# Altium PCB daughterboardFunkySwitch.PcbDoc
Units mil, origin at the board's own origin, x right, y up, seen from the top; angles counter-clockwise.
Board outline 2165.41 x 2548.15 mil, 2 copper layers (Top Layer, Bottom Layer); 8 components, 37 nets, 124 pads, 0 vias.
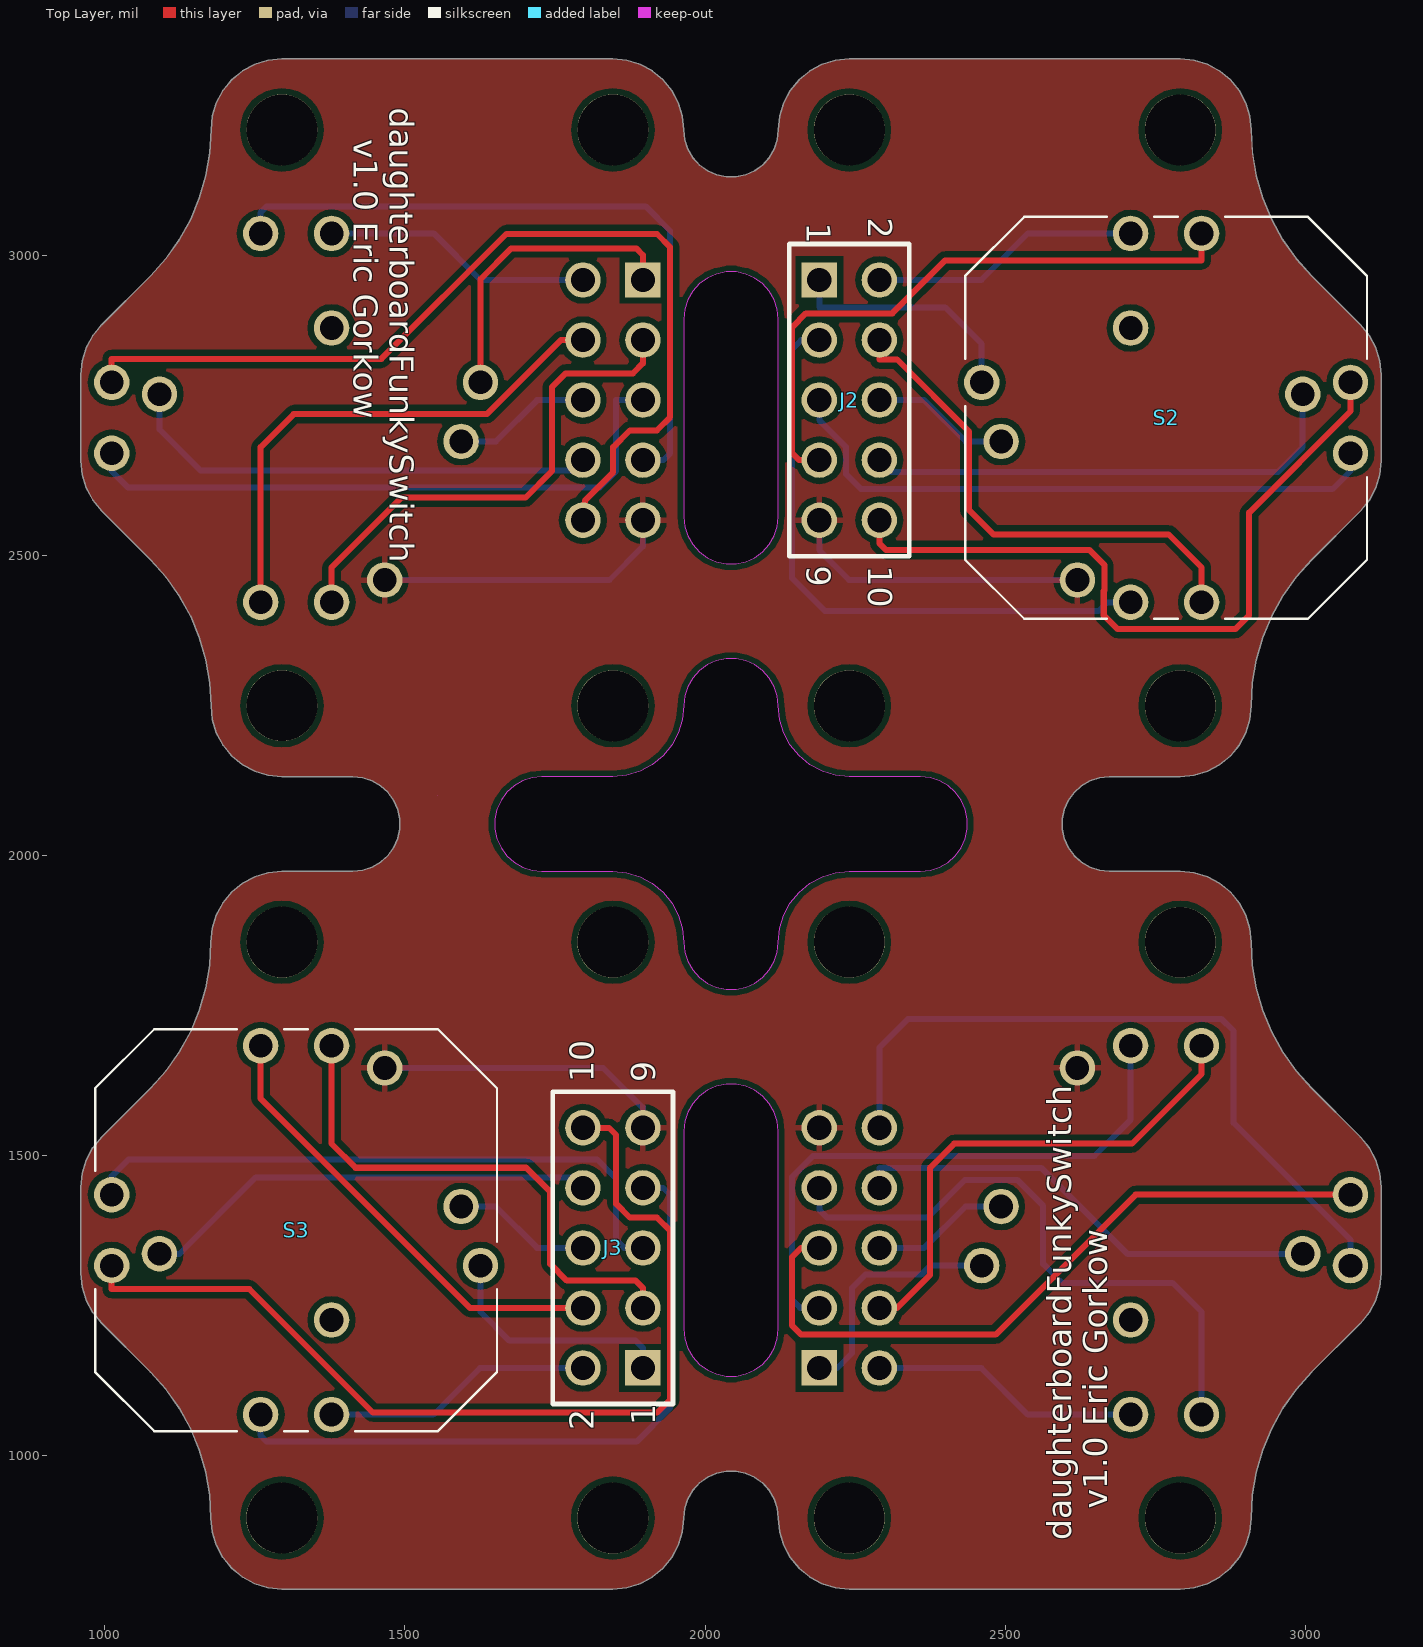
[diagram p0: Top Layer view]
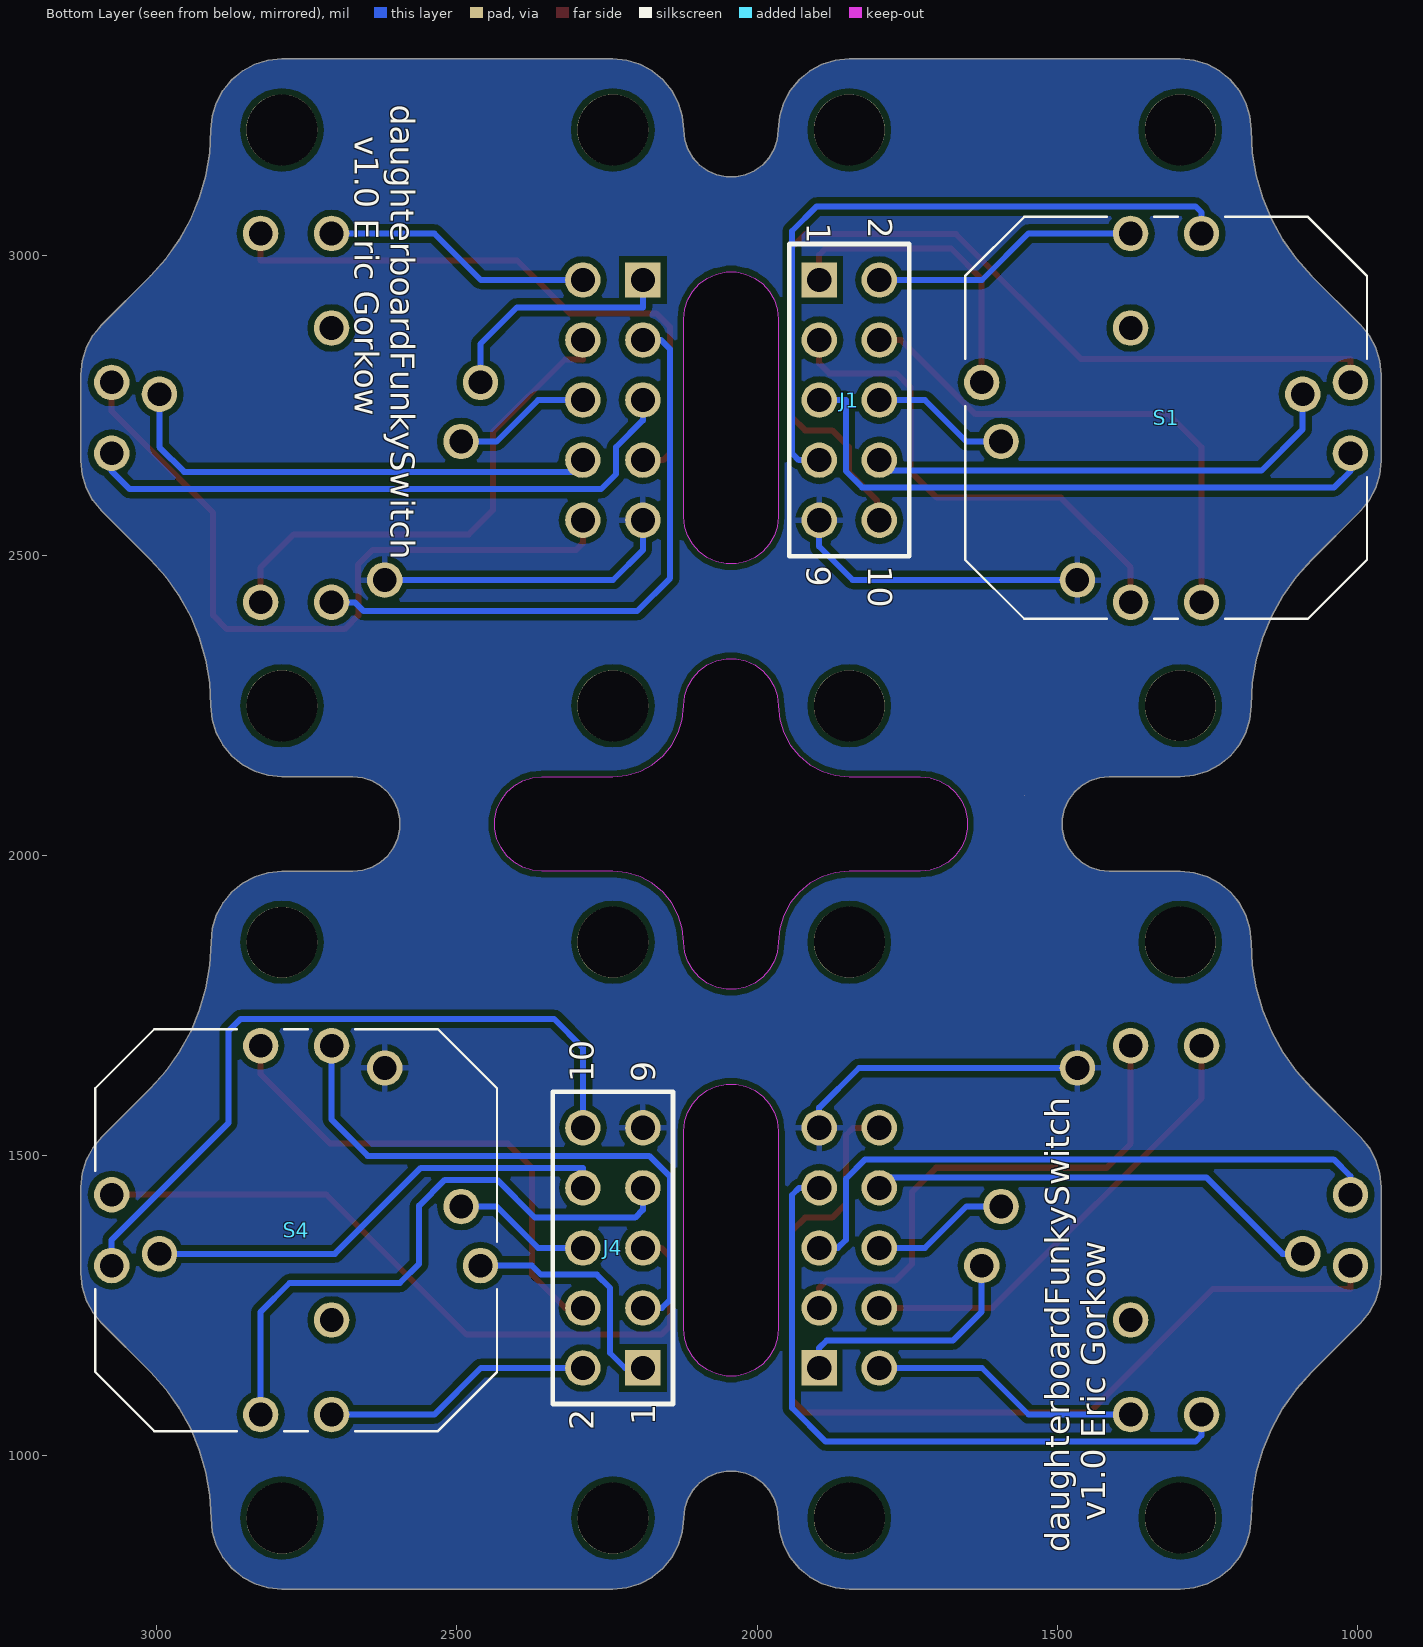
[diagram p1: Bottom Layer view, seen from below]
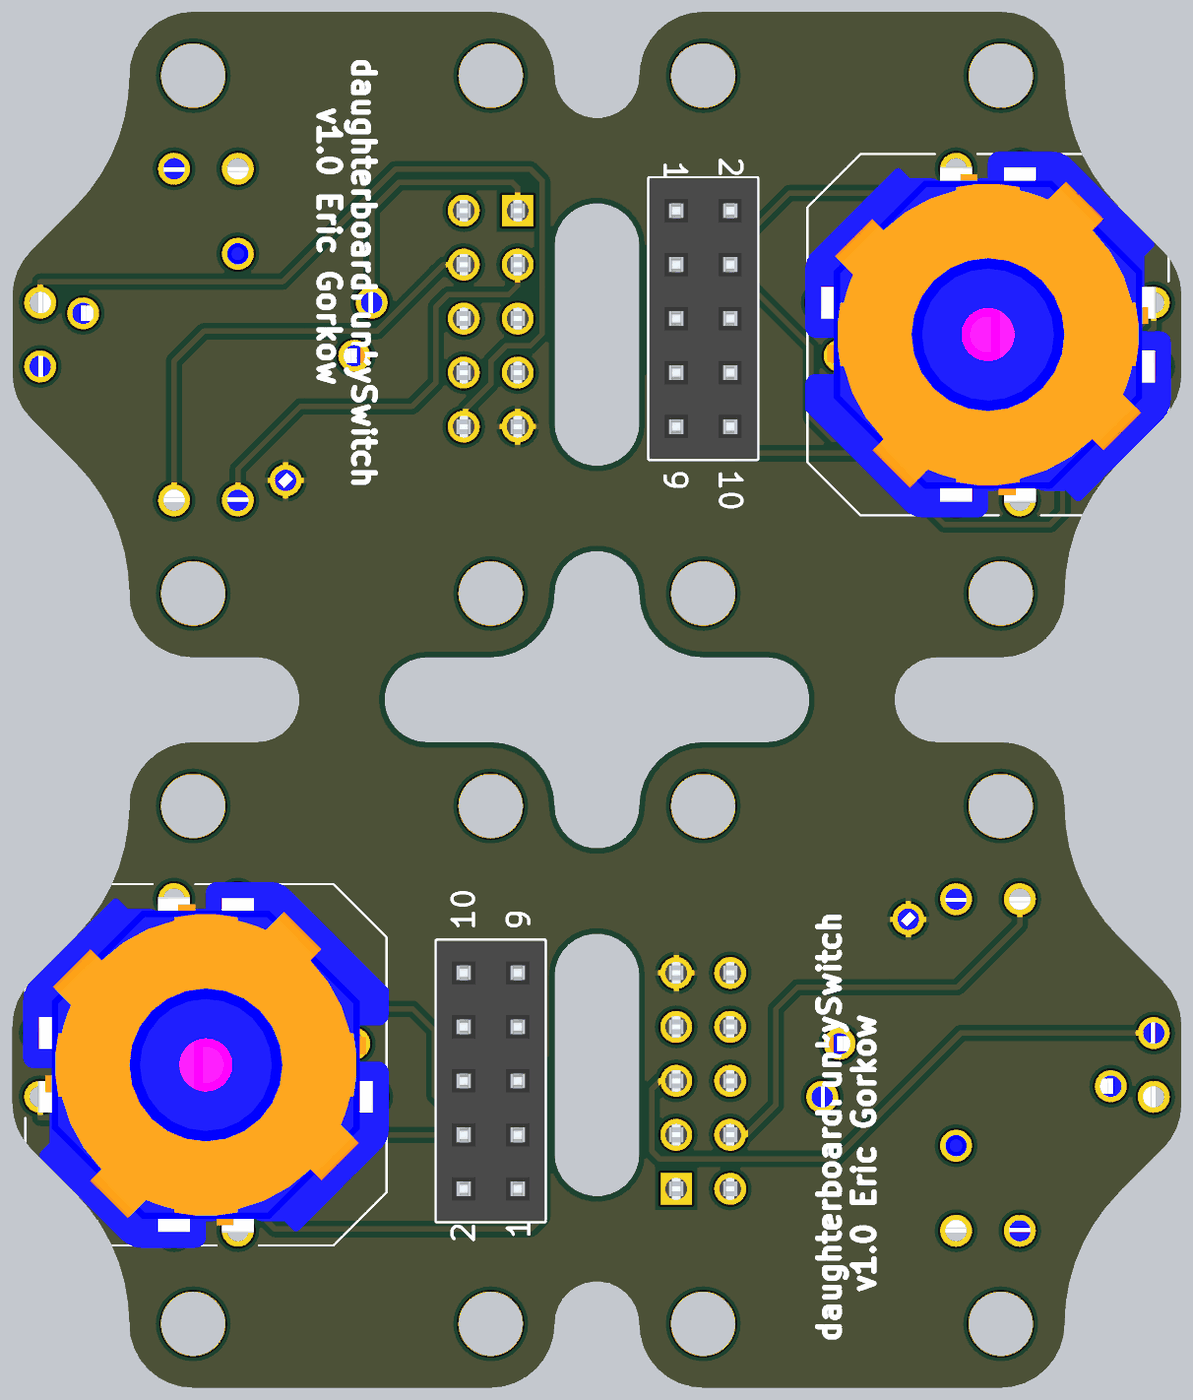
[diagram p2: 3D render of the assembled board from above, using the file's embedded part models]
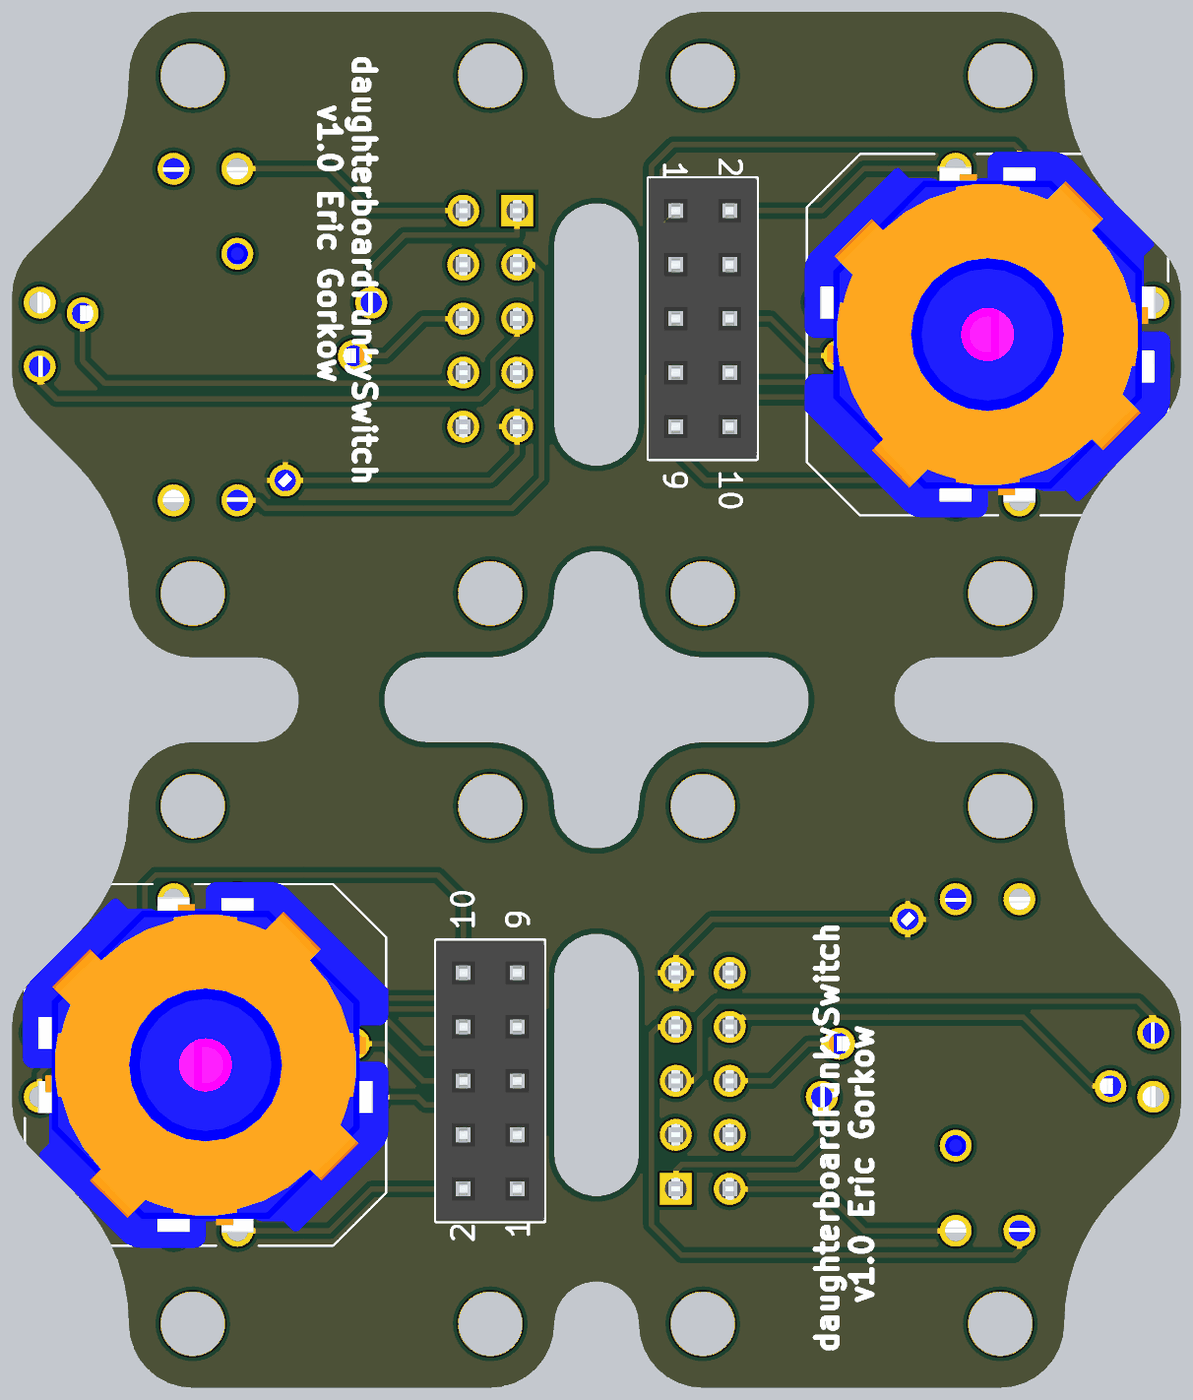
[diagram p3: 3D render of the assembled board from below, using the file's embedded part models]

## Layer stack, top to bottom
Top Solder: solder mask 0.4, Solder Resist, Dk 3.5
Top Layer: signal copper 1.4
Dielectric 1: dielectric 12.6, FR-4, Dk 4.8
Bottom Layer: signal copper 1.4
Bottom Solder: solder mask 0.4, Solder Resist, Dk 3.5

## Board outline
1413.47,2131.24 1295.36,2131.24 1272.31,2133.51 1250.16,2140.23 1229.74,2151.15 1211.84,2165.84 1197.15,2183.74 1186.24,2204.16 1179.52,2226.31 1177.25,2249.36 1175.09,2287.86 1168.63,2325.88 1157.96,2362.94 1143.2,2398.57 1124.54,2432.32 1102.23,2463.78 1076.53,2492.53 995.32,2573.75 980.63,2591.65 969.72,2612.07 963,2634.23 960.73,2657.27 960.73,2800.54 963,2823.59 969.73,2845.74 980.64,2866.16 995.33,2884.06 1076.55,2965.27 1102.25,2994.03 1124.57,3025.48 1143.22,3059.23 1157.98,3094.86 1168.66,3131.92 1175.12,3169.94 1177.28,3208.44 1179.56,3231.48 1186.28,3253.64 1197.19,3274.06 1211.88,3291.96 1229.78,3306.65 1250.2,3317.56 1272.36,3324.28 1295.4,3326.55 1846.58,3326.53 1869.62,3324.26 1891.78,3317.54 1912.2,3306.62 1930.1,3291.93 1944.78,3274.03 1955.7,3253.61 1962.42,3231.46 1964.69,3208.41 1966.41,3192.04 1971.49,3176.39 1979.72,3162.13 1990.74,3149.9 2004.05,3140.22 2019.09,3133.52 2035.19,3130.1 2051.65,3130.1 2067.76,3133.52 2082.79,3140.22 2096.11,3149.89 2107.13,3162.13 2115.36,3176.38 2120.45,3192.04 2122.17,3208.41 2124.44,3231.45 2131.16,3253.61 2142.07,3274.03 2156.76,3291.92 2174.66,3306.61 2195.08,3317.52 2217.24,3324.24 2240.28,3326.51 2791.46,3326.49 2814.5,3324.22 2836.66,3317.5 2857.08,3306.59 2874.98,3291.9 2889.67,3274 2900.58,3253.58 2907.3,3231.42 2909.57,3208.38 2911.73,3169.87 2918.19,3131.85 2928.86,3094.8 2943.62,3059.16 2962.27,3025.41 2984.59,2993.96 3010.28,2965.2 3091.5,2883.98 3106.19,2866.08 3117.1,2845.66 3123.82,2823.51 3126.09,2800.46 3126.08,2657.19 3123.81,2634.15 3117.09,2611.99 3106.18,2591.57 3091.49,2573.67 3010.27,2492.46 2984.57,2463.71 2962.25,2432.25 2943.6,2398.5 2928.84,2362.87 2918.16,2325.82 2911.7,2287.8 2909.53,2249.29 2907.26,2226.25 2900.54,2204.09 2889.63,2183.67 2874.94,2165.78 2857.04,2151.09 2836.62,2140.17 2814.46,2133.45 2791.42,2131.19 2673.31,2131.19 2656.94,2129.47 2641.28,2124.38 2627.03,2116.15 2614.79,2105.14 2605.12,2091.82 2598.42,2076.78 2595,2060.68 2595,2044.22 2598.42,2028.12 2605.11,2013.08 2614.79,1999.76 2627.02,1988.75 2641.28,1980.52 2656.93,1975.43 2673.3,1973.71 2791.41,1973.71 2814.45,1971.43 2836.61,1964.71 2857.03,1953.8 2874.93,1939.11 2889.62,1921.21 2900.53,1900.79 2907.25,1878.63 2909.52,1855.59 2911.68,1817.09 2918.14,1779.07 2928.81,1742.01 2943.57,1706.38 2962.22,1672.62 2984.54,1641.17 3010.24,1612.41 3091.45,1531.19 3106.14,1513.3 3117.05,1492.88 3123.77,1470.72 3126.04,1447.68 3126.03,1304.4 3123.76,1281.36 3117.04,1259.2 3106.13,1238.78 3091.44,1220.89 3010.22,1139.67 2984.52,1110.92 2962.2,1079.47 2943.55,1045.71 2928.79,1010.09 2918.11,973.03 2911.65,935.01 2909.48,896.5 2907.21,873.46 2900.49,851.31 2889.58,830.89 2874.89,812.99 2856.99,798.3 2836.57,787.39 2814.41,780.67 2791.37,778.4 2240.19,778.42 2217.15,780.69 2194.99,787.41 2174.57,798.33 2156.67,813.01 2141.98,830.91 2131.07,851.33 2124.35,873.49 2122.08,896.53 2120.36,912.9 2115.28,928.56 2107.05,942.82 2096.03,955.05 2082.71,964.73 2067.68,971.42 2051.57,974.84 2035.11,974.84 2019.01,971.42 2003.97,964.73 1990.66,955.05 1979.64,942.82 1971.41,928.56 1966.32,912.91 1964.6,896.54 1962.33,873.5 1955.61,851.34 1944.69,830.92 1930,813.02 1912.11,798.34 1891.69,787.42 1869.53,780.7 1846.49,778.43 1295.31,778.45 1272.26,780.72 1250.11,787.45 1229.69,798.36 1211.79,813.05 1197.1,830.95 1186.19,851.37 1179.47,873.53 1177.2,896.57 1175.04,935.07 1168.58,973.09 1157.91,1010.15 1143.15,1045.78 1124.49,1079.53 1102.18,1110.99 1076.48,1139.74 995.27,1220.96 980.58,1238.86 969.67,1259.28 962.95,1281.44 960.68,1304.48 960.68,1447.76 962.95,1470.8 969.68,1492.96 980.59,1513.37 995.28,1531.27 1076.5,1612.48 1102.2,1641.24 1124.52,1672.69 1143.17,1706.44 1157.93,1742.07 1168.61,1779.13 1175.07,1817.15 1177.23,1855.65 1179.51,1878.7 1186.23,1900.85 1197.14,1921.27 1211.83,1939.17 1229.73,1953.86 1250.15,1964.77 1272.31,1971.49 1295.35,1973.76 1413.46,1973.76 1429.83,1975.48 1445.49,1980.56 1459.74,1988.79 1471.98,1999.81 1481.65,2013.12 1488.35,2028.16 1491.77,2044.26 1491.77,2060.72 1488.35,2076.83 1481.66,2091.86 1471.98,2105.18 1459.75,2116.2 1445.49,2124.43 1429.84,2129.51
cut-out: 1728.43,2131.22 1712.06,2129.5 1696.4,2124.42 1682.14,2116.19 1669.91,2105.17 1660.23,2091.86 1653.54,2076.82 1650.11,2060.72 1650.11,2044.26 1653.54,2028.16 1660.23,2013.12 1669.91,1999.8 1682.14,1988.78 1696.39,1980.55 1712.05,1975.47 1728.42,1973.74 1846.53,1973.74 1869.57,1971.47 1891.73,1964.75 1912.15,1953.83 1930.05,1939.14 1944.73,1921.24 1955.65,1900.82 1962.37,1878.67 1964.64,1855.63 1966.36,1839.25 1971.44,1823.6 1979.67,1809.34 1990.69,1797.11 2004,1787.43 2019.04,1780.74 2035.14,1777.31 2051.6,1777.31 2067.71,1780.74 2082.74,1787.43 2096.06,1797.11 2107.08,1809.34 2115.31,1823.59 2120.4,1839.25 2122.12,1855.62 2124.39,1878.66 2131.11,1900.82 2142.02,1921.24 2156.71,1939.13 2174.61,1953.82 2195.03,1964.74 2217.19,1971.46 2240.23,1973.73 2358.34,1973.72 2374.71,1975.44 2390.37,1980.53 2404.62,1988.76 2416.86,1999.77 2426.53,2013.09 2433.23,2028.13 2436.65,2044.23 2436.65,2060.69 2433.23,2076.79 2426.54,2091.83 2416.86,2105.15 2404.63,2116.16 2390.37,2124.39 2374.72,2129.48 2358.35,2131.2 2240.24,2131.21 2217.2,2133.48 2195.04,2140.2 2174.62,2151.11 2156.72,2165.8 2142.03,2183.7 2131.12,2204.12 2124.4,2226.28 2122.13,2249.32 2120.41,2265.69 2115.32,2281.35 2107.09,2295.6 2096.08,2307.84 2082.76,2317.51 2067.73,2324.21 2051.62,2327.63 2035.16,2327.63 2019.06,2324.21 2004.02,2317.52 1990.71,2307.84 1979.69,2295.61 1971.46,2281.35 1966.37,2265.7 1964.65,2249.33 1962.38,2226.28 1955.66,2204.13 1944.74,2183.71 1930.05,2165.81 1912.16,2151.12 1891.74,2140.21 1869.58,2133.49 1846.54,2131.22
cut-out: 1964.67,2893.45 1964.66,2564.29 1966.38,2547.92 1971.47,2532.26 1979.7,2518 1990.71,2505.77 2004.03,2496.09 2019.07,2489.4 2035.17,2485.98 2051.63,2485.97 2067.73,2489.4 2082.77,2496.09 2096.09,2505.77 2107.1,2518 2115.33,2532.25 2120.42,2547.91 2122.14,2564.28 2122.16,2893.45 2120.43,2909.82 2115.35,2925.47 2107.12,2939.73 2096.1,2951.96 2082.79,2961.64 2067.75,2968.34 2051.65,2971.76 2035.19,2971.76 2019.09,2968.34 2004.05,2961.64 1990.73,2951.97 1979.71,2939.73 1971.48,2925.48 1966.4,2909.82
cut-out: 1964.62,1540.66 1964.61,1211.5 1966.33,1195.13 1971.42,1179.47 1979.65,1165.22 1990.66,1152.98 2003.98,1143.31 2019.02,1136.61 2035.12,1133.19 2051.58,1133.19 2067.68,1136.61 2082.72,1143.3 2096.04,1152.98 2107.05,1165.21 2115.28,1179.47 2120.37,1195.12 2122.09,1211.49 2122.11,1540.66 2120.39,1557.03 2115.3,1572.69 2107.07,1586.94 2096.05,1599.18 2082.74,1608.85 2067.7,1615.55 2051.6,1618.97 2035.14,1618.97 2019.04,1615.55 2004,1608.85 1990.68,1599.18 1979.66,1586.95 1971.43,1572.69 1966.35,1557.04
cut-out: 1555,2100
cut-out: 690,2205

## Design rules (kind name [scope] priority, off if disabled: settings)
Clearance [All] p1: gap=10 ignorepadtopadclearanceinfootprint=FALSE except(0: Arc-Hole Track-Hole SMDPad-Hole THPad-Hole Via-Hole Fill-Hole Poly-Hole Region-Hole Text-Hole)
PolygonConnect [All] p1: connectstyle=Relief reliefconductorwidth=10 reliefentries=4 polygonreliefangle="90 Angle" airgapwidth=10
RoutingVias [All] p1: holewidth=28 width=50 viastyle="Through Hole" minholewidth=28 minwidth=50 maxholewidth=28 maxwidth=50
SolderMaskExpansion [All] p1: expansion=4
Width [All] p1: maxlimit=10 minlimit=10 preferedwidth=10
30 further rules are at their usual default settings.

## Components (designator, comment, footprint, x,y, rotation, side; value= is the part's Value field where it differs from the comment)
J1 "61301021821" 61301021821 1846.58,2758.42 r270 bottom
J2 "61301021821" 61301021821 2240.28,2758.42 r270 top
J3 "61301021821" 61301021821 1846.58,1346.54 r90 top
J4 "61301021821" 61301021821 2240.28,1346.54 r90 bottom
S1 "RKJXT1F42001" RKJXT1F42001 1319.01,2728.89 r270 bottom
S2 "RKJXT1F42001" RKJXT1F42001 2767.82,2728.84 r270 top
S3 "RKJXT1F42001" RKJXT1F42001 1318.94,1376.1 r90 top
S4 "RKJXT1F42001" RKJXT1F42001 2767.76,1376.05 r90 bottom

## Footprints (in the part's own frame and the unit in brackets; to place one, negate y for a bottom-side part, rotate by r counter-clockwise, add the part's x,y. Pads: shape width x height; smd on the part's side, far side on the other; paste and mask are expansions set on the pad)
61301021821 [mm] "Dual Socket Header, pitch 2.54mm, 10p"
  rect 1.5x1.5 hole 1.02: 1(-5.08,-1.27)
  round 1.5 hole 1.02: 2(-5.08,1.27) 3(-2.54,-1.27) 4(-2.54,1.27) 5(0,-1.27) 6(0,1.27) 7(2.54,-1.27) 8(2.54,1.27) 9(5.08,-1.27) 10(5.08,1.27)
  silkscreen extent -6.6,-2.54 6.6,2.54, body extent -6.6,-2.54 6.6,2.54, height 8.45
RKJXT1F42001 [mm]
  round 1.5 hole 1: 1(-1.5,-7.8) 2(1,-6.98) 3(6.86,-3.75) 4(7.8,-1.5) 5(7.8,1.5) 6(1.5,7.8) 7(-1,5.78) 8(-1.5,7.8) 9(-7.8,1.5) 10(-7.8,-1.5) 11(-3.8,-1.5)
  silkscreen extent -8.5,-8.5 8.5,8.5, body extent -8.6,-8.6 8.6,8.6, height 17.4

## Part data
J1 J2 J3 J4: "WR-PHD 2.54 mm Dual Socket Header, 10p", Rated Current=3A, Withstanding Voltage="500V AC", Working Voltage="250V AC", ComponentLink1Description=Manufacturer, ComponentLink1URL=http://www.we-online.de, ComponentLink2Description=Datasheet, ComponentLink2URL=http://katalog.we-online.de/em/datasheet/6130xx21821.pdf, Part Number=61301021821, Pin Number=10, Pitch=2.54mm, Published Date="August 2017", Publisher="Wurth Elektronik"
S1 S2 S3 S4: "Switch", Manufacturer_Name=ALPS, Mouser2 Part Number=688-RKJXT1F42001, Datasheet Link=http://www.alps.com/prod/info/E/HTML/MultiControl/Switch/RKJXT/RKJXT1F42001.html, Height=17mm, Manufacturer_Part_Number=RKJXT1F42001, Mouser2 Price/Stock=https://www.mouser.com/Search/Refine.aspx?Keyword=688-RKJXT1F42001

## Free pads (board coordinates)
  round 118.11 hole 118.11: 1(1295.31,896.56) 1(1295.31,896.56) 1(1295.35,1855.65) 1(1295.35,1855.65) 1(1295.36,2249.35) 1(1295.36,2249.35) 1(1295.39,3208.44) 1(1295.4,3208.44) 1(1846.49,896.54) 1(1846.49,896.54) 1(1846.53,1855.63) 1(1846.53,1855.63) 1(1846.54,2249.33) 1(1846.54,2249.33) 1(1846.58,3208.42) 1(1846.58,3208.42) 1(2240.19,896.53) 1(2240.19,896.53) 1(2240.23,1855.62) 1(2240.23,1855.62) 1(2240.24,2249.32) 1(2240.24,2249.32) 1(2240.28,3208.4) 1(2240.28,3208.4) 1(2791.37,896.51) 1(2791.37,896.51) 1(2791.41,1855.6) 1(2791.41,1855.6) 1(2791.42,2249.3) 1(2791.42,2249.3) 1(2791.46,3208.38) 1(2791.46,3208.38)
  round 39.37 hole 39.37: 1(1378,1226.5) 1(1378,1226.5) 1(1378.06,2878.5) 1(1378.06,2878.5) 1(2708.71,1226.45) 1(2708.71,1226.45) 1(2708.77,2878.45) 1(2708.77,2878.45)

## Nets (pads, with @x,y where several pads share a name; then routed paths per layer and width w, separated by ;. In a path a pad name is that pad's centre, name@x,y a point inside that pad or via, vN(x,y) a via of type N, cw(c..) or ccw(c..) an arc to the next point about the centre after c; other vN are vias at no path point)
A1: J1.1 S1.1 | length 509.8
  Top Layer w10: S1.1 1626.09,2960 1677.09,3011 1885.58,3011 1896.58,3000 J1.1
A2: J2.1 S2.1 | length 405.4
  Bottom Layer w10: J2.1 2190.28,2913 2400,2913 2460.74,2852.26 S2.1
A3: J3.1 S3.1 | length 405.9
  Bottom Layer w10: S3.1 1626.03,1240 1674.03,1192 1884.58,1192 1896.58,1180 J3.1
A4: J4.1 S4.1 | length 404.5
  Bottom Layer w10: J4.1 2220,1146.54 2245,1171.54 2245,1280 2267,1302 2360,1302 2375,1317 S4.1
B1: J1.3 S1.4 | length 838.2
  Top Layer w10: S1.4 1378.06,2480 1494.06,2596 1701,2596 1745,2640 1745,2780 1768,2803 1880,2803 1896.58,2819.58 J1.3
B2: J2.3 S2.4 | length 1025.6
  Bottom Layer w10: J2.3 2160,2858.42 2145,2843.42 2145,2462 2200,2407 2655.24,2407 2670,2421.76 S2.4
B3: J3.3 S3.4 | length 884.9
  Top Layer w10: S3.4 1378,1520 1418,1480 1702,1480 1742,1440 1742,1320 1770,1292 1884.58,1292 1896.58,1280 J3.3
B4: J4.3 S4.4 | length 982
  Bottom Layer w10: J4.3 2158.46,1246.54 2145,1260 2145,1464.95 2180,1499.95 2648.66,1499.95 2708.71,1560 S4.4
C1: J1.5 S1.6 | length 1055.3
  Bottom Layer w10: S1.6 1011.92,2640 1038.92,2613 1825,2613 1852,2640 1852,2758.42 J1.5
C2: J2.5 S2.6 | length 1034.4
  Bottom Layer w10: J2.5 2190.28,2724.72 2235,2680 2235,2635 2260,2610 3044.91,2610 3074.91,2640 S2.6
C3: J3.5 S3.6 | length 1047.9
  Bottom Layer w10: S3.6 1011.86,1465.86 1040,1494 1820,1494 1852,1462 1852,1360 1865.46,1346.54 J3.5
C4: J4.5 S4.6 | length 1198.7
  Top Layer w10: J4.5 2160,1346.54 2145,1331.54 2145,1217 2160,1202 2484,1202 2717.11,1435.11 S4.6
COM1: J1.8 S1.7 | length 809.7
  Bottom Layer w10: S1.7 1091.45,2709.55 1160,2641 1796.58,2641 J1.8
COM2: J2.8 S2.7 | length 829.7
  Bottom Layer w10: J2.8 2290.28,2639 2954.38,2639 2995.38,2680 S2.7
COM3: J3.8 S3.7 | length 775.4
  Bottom Layer w10: S3.7 1124.73,1336.73 1252,1464 1796.58,1464 J3.8
COM4: J4.8 S4.7 | length 797.8
  Bottom Layer w10: J4.8 2290.28,1479.95 2560,1479.95 2703.27,1336.68 S4.7
D1: J1.7 S1.9 | length 1158.4
  Bottom Layer w10: S1.9 1259.95,3070.95 1270,3081 1901,3081 1942,3040 1942,2670 1930.42,2658.42 J1.7
D2: J2.7 S2.9 | length 1032.9
  Top Layer w10: J2.7 2156.58,2658.42 2145,2670 2145,2880 2168,2903 2312,2903 2400,2991 2826.88,2991 S2.9
D3: J3.7 S3.9 | length 1149.3
  Bottom Layer w10: S3.9 1259.89,1034.11 1270,1024 1886,1024 1942,1080 1942,1434.54 1930,1446.54 J3.7
D4: J4.7 S4.9 | length 1023.5
  Bottom Layer w10: J4.7 2190.28,1410 2203.28,1397 2370,1397 2432.95,1459.95 2520,1459.95 2563,1416.95 2563,1320 2595,1288 2778.82,1288 2826.82,1240 S4.9
ENCA1: J1.2 S1.10 | length 450.6
  Bottom Layer w10: S1.10 1548,3035.98 1625.56,2958.42 J1.2
ENCA2: J2.2 S2.10 | length 450.6
  Bottom Layer w10: J2.2 2460,2958.42 2537.51,3035.93 S2.10
ENCA3: J3.2 S3.10 | length 450.7
  Bottom Layer w10: S3.10 1548,1069.02 1625.53,1146.54 J3.2
ENCA4: J4.2 S4.10 | length 450.6
  Bottom Layer w10: J4.2 2460,1146.54 2537.58,1068.97 S4.10
ENCB1: J1.4 S1.5 | length 868.7
  Top Layer w10: S1.5 1259.95,2680 1314.95,2735 1636.58,2735 1760,2858.42 J1.4
ENCB2: J2.4 S2.5 | length 847.3
  Top Layer w10: J2.4 2290.28,2826 2320,2826 2440,2706 2440,2575 2480,2535 2771.88,2535 2826.88,2480 S2.5
ENCB3: J3.4 S3.5 | length 769.1
  Top Layer w10: S3.5 1259.89,1595.11 1608.46,1246.54 J3.4
ENCB4: J4.4 S4.5 | length 849.6
  Top Layer w10: J4.4 2320,1246.54 2375,1301.54 2375,1480 2415,1520 2711,1520 2826.82,1635.82 S4.5
ENCC1: J1.10 S1.8 | length 1604.3
  Top Layer w10: S1.8 1011.92,2827 1461,2827 1669,3035 1920,3035 1942,3013 1942,2730 1920,2708 1875,2708 1847,2680 1847,2638 1800,2591 J1.10
ENCC2: J2.10 S2.8 | length 1231.4
  Top Layer w10: J2.10 2290.28,2520 2301.28,2509 2640,2509 2665,2484 2665,2441.61 2664,2440.61 2664,2400 2687,2377 2883,2377 2906,2400 2906,2571.09 3074.91,2740 S2.8
ENCC3: J3.10 S3.8 | length 1628.2
  Top Layer w10: S3.8 1011.86,1278 1241,1278 1447,1072 1920,1072 1942,1094 1942,1375 1920,1397 1875,1397 1852,1420 1852,1534.54 1840,1546.54 J3.10
ENCC4: J4.10 S4.8 | length 1223.1
  Bottom Layer w10: J4.10 2290.28,1680 2338.28,1728 2860,1728 2880,1708 2880,1554.85 3074.85,1360 S4.8
GND: J1.9 J2.9 J3.9 J4.9 S1.3 S2.3 S3.3 S4.3 | length 1488.2
  Bottom Layer w10: S3.3 1830.39,1646.18 1896.58,1580 J3.9 ; S1.3 1840.81,2458.81 1896.58,2514.58 J1.9 ; J2.9 2190.28,2508.49 2240,2458.76 S2.3
Push1: J1.6 S1.2 | length 231.3
  Bottom Layer w10: S1.2 1651.52,2689.52 1720.42,2758.42 J1.6
Push2: J2.6 S2.2 | length 231.3
  Bottom Layer w10: J2.6 2365,2758.42 2433.95,2689.47 S2.2
Push3: J3.6 S3.2 | length 231.4
  Bottom Layer w10: S3.2 1651.53,1415.47 1720.46,1346.54 J3.6
Push4: J4.6 S4.2 | length 231.2
  Bottom Layer w10: J4.6 2365,1346.54 2433.88,1415.43 S4.2
pads on no net: S1.11 S2.11 S3.11 S4.11

## Polygon pours and split planes (outlines as drawn)
GND on Top Layer "Top Layer-No Net" (solid, pour order 12): 265 vertices, not listed, extent 960.68,778.4 3126.09,3326.55
GND on Bottom Layer "Top Layer-No Net1" (solid, pour order 13): 265 vertices, not listed, extent 960.68,778.4 3126.09,3326.55

## Silkscreen, mask and mechanical layers (free items; w line width, h text height)
Top Overlay:
  text "daughterboardFunkySwitch /    v1.0 Eric Gorkow" at 1415,3244.95 h40 r270
  text "daughterboardFunkySwitch /    v1.0 Eric Gorkow" at 2670,860 h40 r90
Bottom Overlay:
  text "daughterboardFunkySwitch /    v1.0 Eric Gorkow" at 2670,3250 h40 r90
  text "daughterboardFunkySwitch /    v1.0 Eric Gorkow" at 1420,840 h40 r270
Mechanical 1:
  drawing of 642 lines, arcs and shapes, not listed

## Text inside footprints (layer, text, board x,y; h text height)
J1: Bottom Overlay "9" at 1917.44,2482.43 h40 r90; Bottom Overlay "10" at 1815.08,2482.43 h40 r90; Bottom Overlay "1" at 1917.44,3054.09 h40 r90; Bottom Overlay "2" at 1815.08,3061.96 h40 r90
J2: Top Overlay "2" at 2271.77,3061.96 h40 r270; Top Overlay "1" at 2169.41,3054.09 h40 r270; Top Overlay "10" at 2271.77,2482.43 h40 r270; Top Overlay "9" at 2169.41,2482.43 h40 r270
J3: Top Overlay "9" at 1917.44,1622.53 h40 r90; Top Overlay "10" at 1815.08,1622.53 h40 r90; Top Overlay "1" at 1917.44,1050.87 h40 r90; Top Overlay "2" at 1815.08,1043 h40 r90
J4: Bottom Overlay "9" at 2169.41,1622.53 h40 r270; Bottom Overlay "10" at 2271.77,1622.53 h40 r270; Bottom Overlay "1" at 2169.41,1050.87 h40 r270; Bottom Overlay "2" at 2271.77,1043 h40 r270